# EAGLE board 4xNKK (EAGLE 5.10)
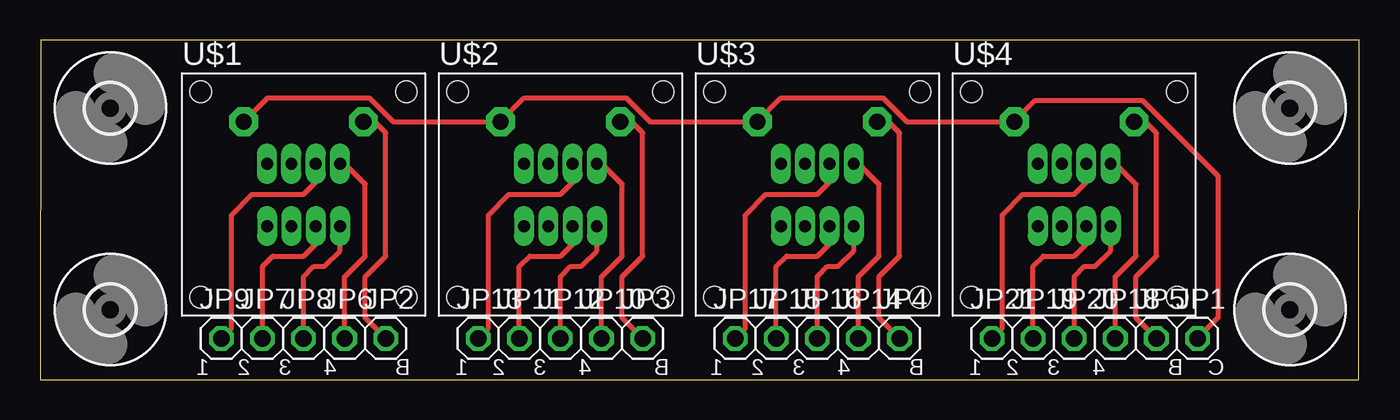
[diagram p0: board, top side]
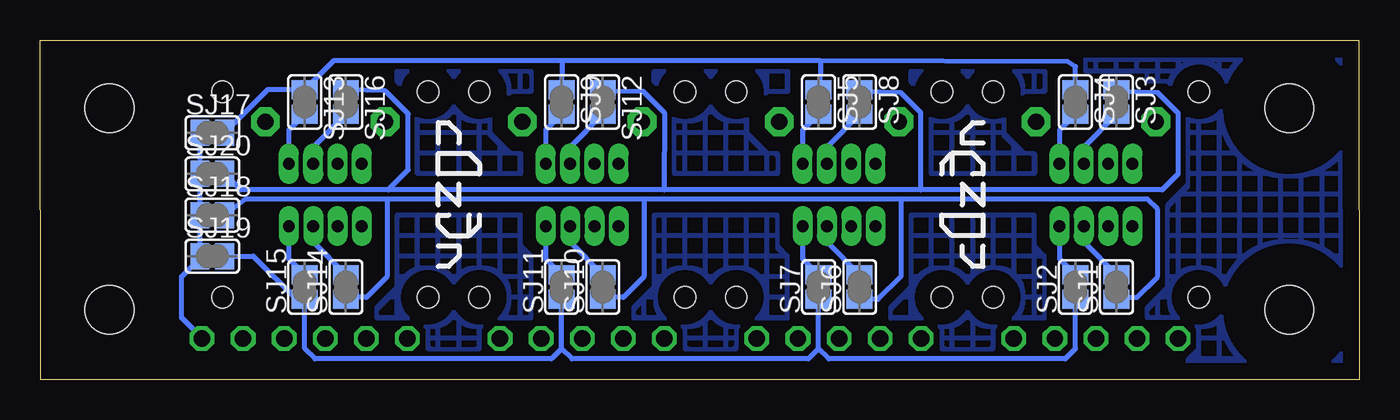
[diagram p1: board, bottom side, seen from below]

Size 81.48 x 20.95 mm. Coordinates in mm from the lower left corner, seen from the top.
Outline: 0,0 81.46,0 81.48,20.95 0.03,20.95 0,0
Copper layers (1*16): Top 0.035mm / dielectric 1.5mm / Bottom 0.035mm
Design rules "default": minimum track width 10mil, minimum drill 24mil, track to track 8mil, track to pad 8mil, pad to pad 8mil, via to via 8mil, smd to smd 8mil, copper to edge 40mil, drill to drill 8mil, minimum pad ring 10mil, minimum via ring 8mil, stop-mask expansion 4mil, vias tented up to drill 0mil, thermal gap 10mil

## Footprints (pad centres in the part's own frame; a part is rotated, then mirrored left to right if it is on the bottom)
1X01 = drill 1.016 octagon: 1 0,0
SJ = smd 1.168 x 1.6: 1 -0.762,0; 2 0.762,0
NKK-15MM-RGB = drill 1 pad 1.778 octagon: B1 -3.7,4.5; B2 3.7,4.5 | drill 0.737 pad 0.813 long: B- 0.75,1.9; COM+ 2.25,1.9; G- 2.25,-1.95; P$1 -0.75,-1.95; P$6 -2.25,-1.95; P$8 -0.75,1.9; P$9 -2.25,1.9; R- 0.75,-1.95 | hole 1.3: -6.35,6.35; 6.35,6.35; 6.35,-6.35; -6.35,-6.35
3,0 = hole 3: 0,0

## Placement (x,y rotation side)
JP1  [1X01]  71.5,2.54 0 top
JP2  [1X01]  21.34,2.54 0 top
JP3  [1X01]  37.21,2.54 0 top
JP4  [1X01]  53.09,2.54 0 top
JP5  [1X01]  68.96,2.54 0 top
JP6  [1X01]  18.8,2.54 0 top
JP7  [1X01]  13.72,2.54 0 top
JP8  [1X01]  16.26,2.54 0 top
JP9  [1X01]  11.18,2.54 0 top
JP10  [1X01]  34.67,2.54 0 top
JP11  [1X01]  29.59,2.54 0 top
JP12  [1X01]  32.13,2.54 0 top
JP13  [1X01]  27.05,2.54 0 top
JP14  [1X01]  50.55,2.54 0 top
JP15  [1X01]  45.47,2.54 0 top
JP16  [1X01]  48.01,2.54 0 top
JP17  [1X01]  42.93,2.54 0 top
JP18  [1X01]  66.42,2.54 0 top
JP19  [1X01]  61.34,2.54 0 top
JP20  [1X01]  63.88,2.54 0 top
JP21  [1X01]  58.8,2.54 0 top
SJ1  [SJ]  14.99,5.71 90 bottom
SJ2  [SJ]  17.53,5.71 90 bottom
SJ3  [SJ]  14.99,17.14 270 bottom
SJ4  [SJ]  17.53,17.14 270 bottom
SJ5  [SJ]  33.4,17.14 270 bottom
SJ6  [SJ]  30.86,5.71 90 bottom
SJ7  [SJ]  33.4,5.71 90 bottom
SJ8  [SJ]  30.86,17.14 270 bottom
SJ9  [SJ]  49.28,17.14 270 bottom
SJ10  [SJ]  46.74,5.71 90 bottom
SJ11  [SJ]  49.28,5.71 90 bottom
SJ12  [SJ]  46.74,17.14 270 bottom
SJ13  [SJ]  65.15,17.14 270 bottom
SJ14  [SJ]  62.61,5.71 90 bottom
SJ15  [SJ]  65.15,5.71 90 bottom
SJ16  [SJ]  62.61,17.14 270 bottom
SJ17  [SJ]  70.87,15.24 0 bottom
SJ18  [SJ]  70.87,10.16 0 bottom
SJ19  [SJ]  70.87,7.62 0 bottom
SJ20  [SJ]  70.87,12.7 0 bottom
U$1  NKK-RGB-15MM  [NKK-15MM-RGB]  16.26,11.43 0 top
U$2  NKK-RGB-15MM  [NKK-15MM-RGB]  32.13,11.43 0 top
U$3  NKK-RGB-15MM  [NKK-15MM-RGB]  48.01,11.43 0 top
U$4  NKK-RGB-15MM  [NKK-15MM-RGB]  63.88,11.43 0 top
U$5  [3,0]  77.22,16.76 0 top
U$6  [3,0]  77.22,4.32 0 top
U$7  [3,0]  4.32,4.32 0 top
U$8  [3,0]  4.32,16.76 0 top

## Library data of the parts
JP1-JP21 = pinhead
SJ1-SJ20 = jumper
U$1-U$4 = c0z3n_NKK_2
U$5-U$8 = holes

## Nets
N$1: JP1.1 SJ17.1 SJ18.1 SJ19.1 SJ20.1 U$1.B1 U$2.B1 U$3.B1 U$4.B1
N$2: JP2.1 U$1.B2
N$3: JP6.1 SJ4.2 U$1.COM+
N$4: JP7.1 SJ1.2 U$1.R-
N$5: JP8.1 SJ2.2 U$1.G-
N$6: JP9.1 SJ3.2 U$1.B-
N$17: JP20.1 SJ15.2 U$4.G-
N$18: JP21.1 SJ16.2 U$4.B-
N$19: JP3.1 U$2.B2
N$20: JP4.1 U$3.B2
N$21: JP5.1 U$4.B2
N$22: JP10.1 SJ5.2 U$2.COM+
N$23: JP11.1 SJ6.2 U$2.R-
N$24: JP12.1 SJ7.2 U$2.G-
N$25: JP13.1 SJ8.2 U$2.B-
N$26: JP14.1 SJ9.2 U$3.COM+
N$27: JP15.1 SJ10.2 U$3.R-
N$28: JP16.1 SJ11.2 U$3.G-
N$29: JP17.1 SJ12.2 U$3.B-
N$30: JP18.1 SJ13.2 U$4.COM+
N$31: JP19.1 SJ14.2 U$4.R-
N$32: SJ4.1 SJ5.1 SJ9.1 SJ13.1 SJ17.2
N$33: SJ1.1 SJ6.1 SJ10.1 SJ14.1 SJ18.2
N$34: SJ2.1 SJ7.1 SJ11.1 SJ15.1 SJ19.2
N$35: SJ3.1 SJ8.1 SJ12.1 SJ16.1 SJ20.2

## Tracks (layer width: path | path; a pad name or v marks a point on that pad's centre or on a via)
N$1
  Top 0.305: U$1.B1 14.03,17.4 20.32,17.4 21.79,15.93 U$2.B1 29.9,17.4 36.2,17.4 37.66,15.93 U$3.B1 45.78,17.4 52.07,17.4 53.54,15.93 U$4.B1 61.5,17.25 68.1,17.25 72.77,12.57 72.77,3.81 JP1.1
  Bottom 0.305: SJ17.1 SJ20.1 SJ18.1 SJ19.1 71.63,7.49 72.77,6.35 72.77,3.81 JP1.1
N$2
  Top 0.305: JP2.1 20.07,3.81 20.07,6.35 21.34,7.62 21.34,15.24 20.65,15.93 U$1.B2
N$3
  Top 0.305: JP6.1 18.8,6.35 20.07,7.62 20.07,12.07 18.8,13.33 U$1.COM+
  Bottom 0.305: SJ4.2 18.51,15.4 U$1.COM+
N$4
  Top 0.305: JP7.1 13.72,6.98 14.35,7.62 16.26,7.62 17.01,8.37 U$1.R-
  Bottom 0.305: SJ1.2 17.01,8.5 U$1.R-
N$5
  Top 0.305: JP8.1 16.26,6.35 16.89,6.98 17.53,6.98 18.51,7.96 U$1.G-
  Bottom 0.305: SJ2.2 18.51,7.46 U$1.G-
N$6
  Top 0.305: JP9.1 11.81,3.18 11.81,10.16 13.08,11.43 16.26,11.43 17.01,12.18 U$1.B-
  Bottom 0.305: SJ3.2 17.01,14.36 U$1.B-
N$7
  pour Bottom (hatched): 1.02,20.32 1.02,1.27 1.02,0.63 10.54,0.63 10.54,1.27 9.91,1.9 9.91,3.18 10.54,3.81 13.08,3.81 13.08,4.45 11.81,5.71 11.81,10.79 10.54,12.07 10.54,17.14 11.81,18.41 13.08,18.41 13.08,19.05 16.89,19.05 16.89,20.32 1.65,20.32
N$8
  pour Bottom (hatched): 20.07,19.05 19.43,19.05 19.43,17.78 20.7,17.78 21.97,16.51 21.97,15.24 20.7,13.97 20.07,13.97 20.07,12.7 26.42,12.7 26.42,16.51 26.42,17.14 27.69,18.41 27.69,19.05
N$9
  pour Bottom (hatched): 20.07,10.16 27.05,10.16 27.69,10.16 27.69,5.71 28.96,4.45 28.96,3.81 26.42,3.81 25.78,3.18 25.78,1.9 23.24,1.9 22.61,1.9 22.61,3.18 21.97,3.81 21.34,3.81 19.43,3.81 19.43,7.62 20.07,8.25
N$10
  pour Bottom (hatched): 35.31,19.05 35.31,17.78 36.58,17.78 37.85,16.51 37.85,15.24 36.58,13.97 35.94,13.97 35.94,12.7 41.66,12.7 42.29,12.7 42.29,17.14 43.56,18.41 43.56,19.05
N$11
  pour Bottom (hatched): 36.58,10.16 42.93,10.16 43.56,10.16 43.56,5.71 44.83,4.45 44.83,3.81 42.29,3.81 41.66,3.18 41.66,1.9 38.48,1.9 38.48,3.18 37.85,3.81 35.31,3.81 35.31,7.62 35.94,8.25 35.94,10.16
N$12
  pour Bottom (hatched): 51.82,19.05 51.18,19.05 51.18,17.78 52.45,17.78 53.72,16.51 53.72,15.24 52.45,13.97 51.82,13.97 51.82,12.7 58.17,12.7 58.17,16.51 58.17,17.14 59.44,18.41 59.44,19.05
N$13
  pour Bottom (hatched): 51.82,10.16 58.8,10.16 59.44,10.16 59.44,5.71 60.71,4.45 60.71,3.81 58.17,3.81 57.53,3.18 57.53,1.9 54.36,1.9 54.36,3.18 53.72,3.81 51.18,3.81 51.18,7.62 51.82,8.25
N$17
  Top 0.305: JP20.1 63.88,6.35 64.52,6.98 65.15,6.98 66.13,7.96 U$4.G-
  Bottom 0.305: SJ15.2 66.13,7.46 U$4.G-
N$18
  Top 0.305: JP21.1 59.44,3.18 59.44,10.16 60.71,11.43 63.88,11.43 64.63,12.18 U$4.B-
  Bottom 0.305: SJ16.2 64.63,14.36 U$4.B-
N$19
  Top 0.305: JP3.1 35.94,3.81 35.94,6.35 37.21,7.62 37.21,15.24 36.52,15.93 U$2.B2
N$20
  Top 0.305: JP4.1 51.82,3.81 51.82,6.35 53.09,7.62 53.09,15.24 52.4,15.93 U$3.B2
N$21
  Top 0.305: JP5.1 67.69,3.81 67.69,6.35 68.96,7.62 68.96,15.24 68.27,15.93 U$4.B2
N$22
  Top 0.305: JP10.1 34.67,6.35 35.94,7.62 35.94,12.07 34.68,13.33 U$2.COM+
  Bottom 0.305: SJ5.2 34.38,15.4 U$2.COM+
N$23
  Top 0.305: JP11.1 29.59,6.98 30.23,7.62 32.13,7.62 32.88,8.37 U$2.R-
  Bottom 0.305: SJ6.2 32.88,8.5 U$2.R-
N$24
  Top 0.305: JP12.1 32.13,6.35 32.77,6.98 33.4,6.98 34.38,7.96 U$2.G-
  Bottom 0.305: SJ7.2 34.38,7.46 U$2.G-
N$25
  Top 0.305: JP13.1 27.69,3.18 27.69,10.16 28.96,11.43 32.13,11.43 32.88,12.18 U$2.B-
  Bottom 0.305: SJ8.2 32.88,14.36 U$2.B-
N$26
  Top 0.305: JP14.1 50.55,6.35 51.82,7.62 51.82,12.07 50.55,13.33 U$3.COM+
  Bottom 0.305: SJ9.2 50.26,15.4 U$3.COM+
N$27
  Top 0.305: JP15.1 45.47,6.98 46.1,7.62 48.01,7.62 48.76,8.37 U$3.R-
  Bottom 0.305: SJ10.2 48.76,8.5 U$3.R-
N$28
  Top 0.305: JP16.1 48.01,6.35 48.64,6.98 49.28,6.98 50.26,7.96 U$3.G-
  Bottom 0.305: SJ11.2 50.26,7.46 U$3.G-
N$29
  Top 0.305: JP17.1 43.56,3.18 43.56,10.16 44.83,11.43 48.01,11.43 48.76,12.18 U$3.B-
  Bottom 0.305: SJ12.2 48.76,14.36 U$3.B-
N$30
  Top 0.305: JP18.1 66.42,6.35 67.69,7.62 67.69,12.07 66.43,13.33 U$4.COM+
  Bottom 0.305: SJ13.2 66.13,15.4 U$4.COM+
N$31
  Top 0.305: JP19.1 61.34,6.98 61.98,7.62 63.88,7.62 64.63,8.37 U$4.R-
  Bottom 0.305: SJ14.2 64.63,8.5 U$4.R-
N$32
  Bottom 0.305: SJ17.2 67.44,17.91 SJ13.1 63.37,19.68 49.25,19.68 | 33.27,19.68 18.01,19.63 17.53,19.33 SJ4.1 | 33.27,19.68 49.25,19.68 | SJ5.1 33.3,18.01 33.27,19.68 | 49.25,19.68 SJ9.1
N$33
  Bottom 0.305: SJ1.1 14.86,5.08 13.72,5.08 12.45,6.35 12.45,10.52 13.08,11.15 28.32,11.12 | 28.32,11.12 28.32,6.35 29.72,4.95 SJ6.1 | SJ10.1 46.61,5.08 45.47,5.08 44.2,6.35 44.2,11.12 | 28.32,11.12 44.2,11.12 | SJ14.1 62.48,5.08 61.34,5.08 60.07,6.35 60.07,11.12 | 44.2,11.12 60.07,11.12 | SJ18.2 68.83,11.12 60.07,11.12
N$34
  Bottom 0.305: 49.28,1.9 49.91,1.27 64.52,1.27 65.15,1.9 SJ15.1 65.66,4.95 68.33,7.62 SJ19.2 | 49.28,1.9 SJ11.1 | 49.28,1.9 48.64,1.27 34.04,1.27 33.4,1.9 | 33.4,1.9 SJ7.1 | 33.4,1.9 32.77,1.27 18.16,1.27 17.53,1.9 SJ2.1
N$35
  Bottom 0.305: SJ20.2 69.11,11.71 60,11.71 | 60,11.71 58.75,12.95 58.75,16.41 60.17,17.83 SJ16.1 | SJ3.1 14.86,17.78 12.45,17.73 11.18,16.46 11.18,12.7 12.17,11.71 27.08,11.71 | 27.08,11.71 42.93,11.71 | 42.93,11.71 60,11.71 | SJ8.1 30.73,17.78 28.3,17.7 27.08,16.48 27.08,11.71 | SJ12.1 46.61,17.78 44.25,17.8 42.9,16.43 42.93,11.71

## Text on the board
tPlace: 1 | 2 | 3 | 4 | B | 1 | 2 | 3 | 4 | B | 1 | 2 | 3 | 4 | B | 1 | 2 | 3 | 4 | B | C